# Altium PCB PCB1.PcbDoc (part 2 of 6)
Units mil, origin at the board's own origin, x right, y up, seen from the top; angles counter-clockwise.
Board outline 7480.32 x 4921.26 mil, 4 copper layers (Top Layer, GND, POWER, Bottom Layer), stack 23.756 mil thick; 513 components, 387 nets, 1792 pads, 594 vias.
Unrouted connection lines stored in the file: 21.
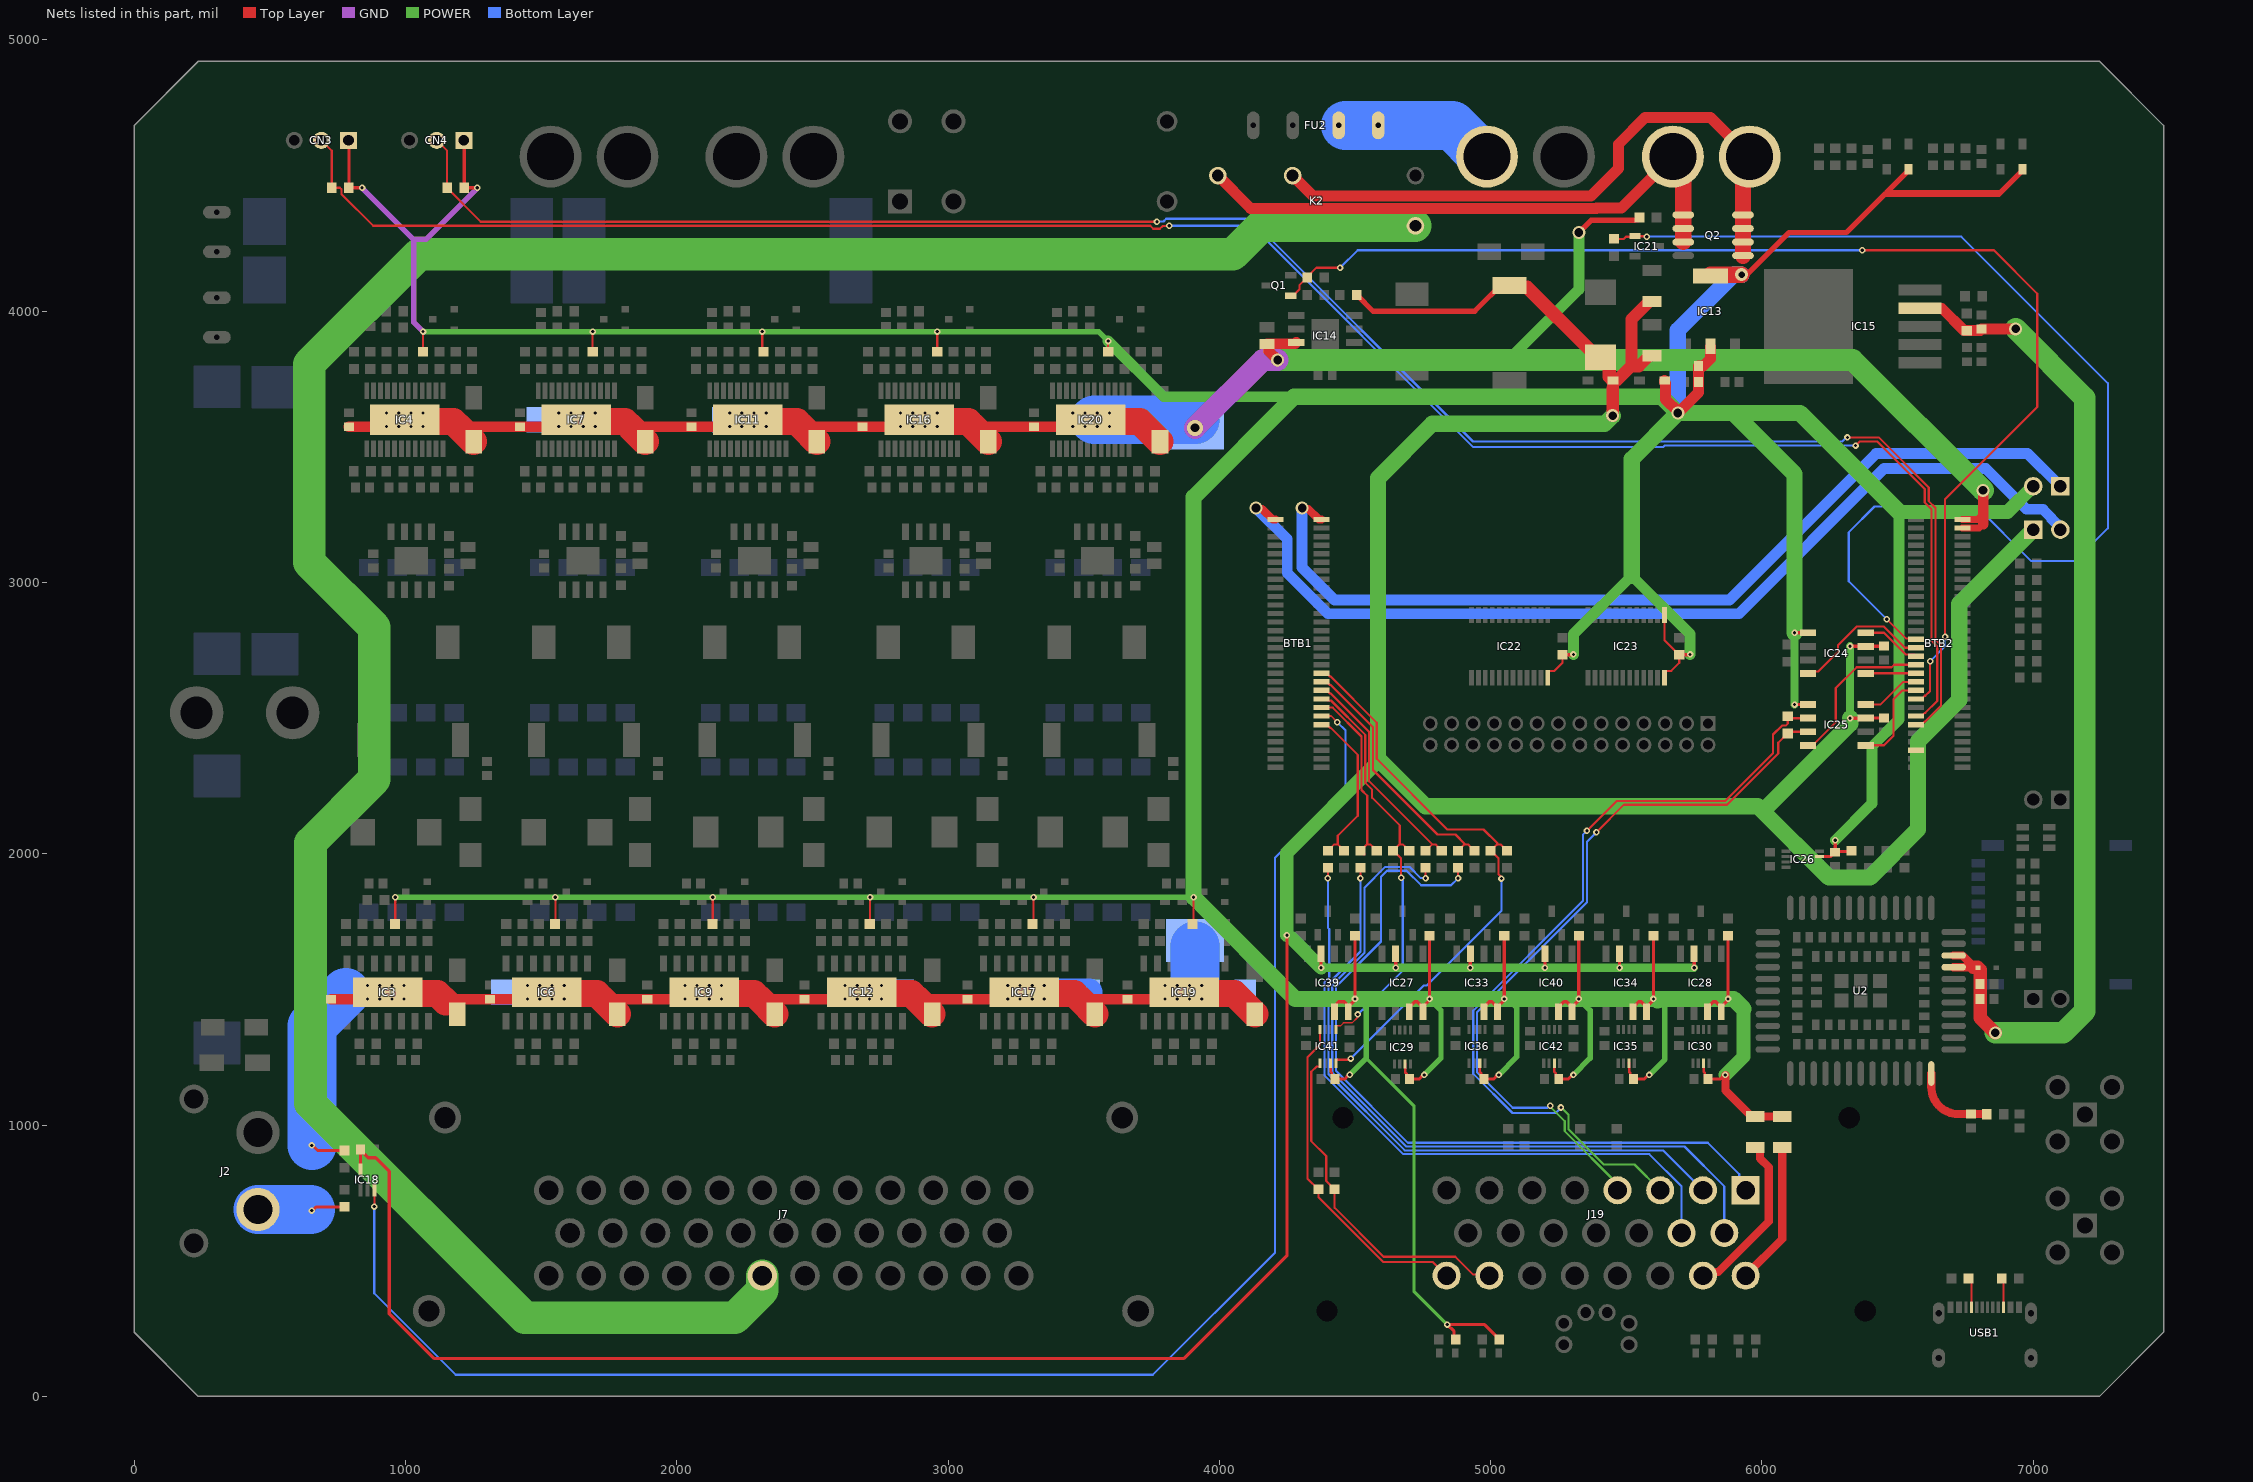
[diagram p4: the nets of this part, all layers, seen from the top]

## Footprints (in the part's own frame and the unit in brackets; to place one, negate y for a bottom-side part, rotate by r counter-clockwise, add the part's x,y. Pads: shape width x height; smd on the part's side, far side on the other; paste and mask are expansions set on the pad) (continued)
KHIPEXSMAKWE [mm]
  rect 2.25x2.25 hole 1.5: 1(0,0)
  round 2.25 hole 1.5: 2(-2.54,-2.54) 3(2.54,-2.54) 4(2.54,2.54) 5(-2.54,2.54)
  silkscreen extent -11.6,-4.2 3.2,3.2, body extent -11.6,-3.2 3.2,3.2, height 9.8
LCC-109_L17.7-W15.8-P1.10_EC800M-CN [mm]
  oval 2.3x0.6 smd: 1(-7.75,6.6) 2(-7.75,5.5) 3(-7.75,4.4) 4(-7.75,3.3) 5(-7.75,2.2) 6(-7.75,1.1) 7(-7.75,0) 8(-7.75,-1.1) 9(-7.75,-2.2) 10(-7.75,-3.3) 11(-7.75,-4.4) 12(-7.75,-5.5) 13(-7.75,-6.6) 23(7.75,-6.6) 24(7.75,-5.5) 25(7.75,-4.4) 26(7.75,-3.3) 27(7.75,-2.2) 28(7.75,-1.1) 29(7.75,0) 30(7.75,1.1) 31(7.75,2.2) 32(7.75,3.3) 33(7.75,4.4) 34(7.75,5.5) 35(7.75,6.6)
  oval 0.6x2.3 smd: 14(-4.4,-8.7) 15(-3.3,-8.7) 16(-2.2,-8.7) 17(-1.1,-8.7) 18(0,-8.7) 19(1.1,-8.7) 20(2.2,-8.7) 21(3.3,-8.7) 22(4.4,-8.7) 36(4.4,8.7) 37(3.3,8.7) 38(2.2,8.7) 39(1.1,8.7) 40(0,8.7) 41(-1.1,8.7) 42(-2.2,8.7) 43(-3.3,8.7) 44(-4.4,8.7) 95(-5.5,-8.7) 96(5.5,-8.7) 97(5.5,8.7) 98(-5.5,8.7)
  rect 1x0.7 smd: 45(-5,4.8) 46(-5,3.6) 47(-5,2.4) 48(-5,1.2) 49(-5,0) 50(-5,-1.2) 51(-5,-2.4) 52(-5,-3.6) 53(-5,-4.8) 59(5,-4.8) 60(5,-3.6) 61(5,-2.4) 62(5,-1.2) 63(5,0) 64(5,1.2) 65(5,2.4) 66(5,3.6) 67(5,4.8) 73(-3.2,4.2) 74(-3.2,3) 75(-3.2,1.8) 76(-3.2,0.6) 77(-3.2,-0.6) 78(-3.2,-1.8) 79(-3.2,-3) 80(-3.2,-4.2) 81(3.2,-4.2) 82(3.2,-3) 83(3.2,-1.8) 84(3.2,-0.6) 85(3.2,0.6) 86(3.2,1.8) 87(3.2,3) 88(3.2,4.2) 99(-5,6) 100(-5,-6) 103(5,-6) 104(5,6)
  rect 0.7x1 smd: 54(-2.4,-5.95) 55(-1.2,-5.95) 56(0,-5.95) 57(1.2,-5.95) 58(2.4,-5.95) 68(2.4,5.95) 69(1.2,5.95) 70(0,5.95) 71(-1.2,5.95) 72(-2.4,5.95) 101(-3.6,-5.95) 102(3.6,-5.95) 105(3.6,5.95) 106(-3.6,5.95) 107(-1.2,-4.15) 108(0,-4.15) 109(1.2,-4.15)
  rect 1.3x1.3 smd: 89(-0.9,1.8) 90(-0.9,0) 91(-0.9,-1.8) 92(0.9,-1.8) 93(0.9,0) 94(0.9,1.8)
  silkscreen extent -9.4,-8.9 7.9,9
LED-SMD_L1.7-W1.1-R-RD_GREEN [mm]
  rect 0.6x0.8 smd: 1(0.75,0) 2(-0.75,0)
  silkscreen extent -0.49,-0.25 0.48,0.85
MIC29302WU [mil]
  rect 40.98x159.02 smd: 1(-134.02,0) 2(-67.01,0) 3(0,0) 4(67.01,0) 5(134.02,0)
  rect 422.99x327.01 smd: 6(0,411.5)
  silkscreen extent -200,-105 200,229, body extent -210,-78 210,547, height 203
POSCAP_D12_D15_D15E_D2E_D2_D3L_D4 [mm]
  rect 2.4x2.9 smd: 1(-3.05,0) 2(3.05,0)
  silkscreen extent -4.95,-2.15 3.65,2.15, body extent -3.65,-2.15 3.65,2.15, height 1.8
QM13.2 [mm]
  rect 1.6x1.8 smd: 1(-6.8,0) 2(6.8,0)
  silkscreen extent -5.59,-0.76 5.59,0.76
RESC1608X55N [mm]
  rect 0.9x0.95 smd: 1(-0.8,0) 2(0.8,0)
  silkscreen extent 0,-0.3 0,0.3, body extent -0.8,-0.4 0.8,0.4, height 0.55
RESC3116X65N [mm]
  rect 1.05x1.75 smd: 1(-1.45,0) 2(1.45,0)
  silkscreen extent 0,-0.69 0,0.69, body extent -1.55,-0.79 1.55,0.79, height 0.65
RESC6432X06N__2512RES [mm] "Chip Resistor, 2-Leads, Body 6.35x3.20mm, IPC Medium Density"
  rect 1.15x3.4 smd: 1(-3,0) 2(3,0)
  silkscreen extent -2.05,-1.6 2.05,1.6, body extent -3.2,-1.6 3.2,1.6, height 1.1
SDRH104R3R3NT [mm]
  rect 3.2x1.6 smd: 1(0,-4.45) 2(0,4.45)
  silkscreen extent -5,-5.8 5,5.1, body extent -5,-5.1 5,5.1, height 4.2
SIM-SMD_SMN-303 [mm]
  rect 1x2.1 smd: 8(-6.5,5.328) 9(6.5,5.328) 10(6.5,-6.672) 11(-6.5,-6.672)
  rect 0.8x1.3 smd: C1(0.25,6.672) C2(-2.29,6.672) C3(-4.83,6.672) C6(-1.02,6.672) C7(-3.56,6.672)
  rect 0.65x1.3 smd: C5(1.52,6.672) CD(2.47,6.672)
  Keep-Out Layer board cut-out: 3.875,-5.422 3.875,-5.348 3.818,-5.21 3.712,-5.104 3.575,-5.047 3.425,-5.047 3.288,-5.104 3.182,-5.21 3.125,-5.348 3.125,-5.422 3.125,-5.497 3.182,-5.635 3.288,-5.74 3.425,-5.797 3.575,-5.797 3.712,-5.74 3.818,-5.635 3.875,-5.497 3.875,-5.422 3.875,-5.422
  Keep-Out Layer board cut-out: -4.625,-5.422 -4.625,-5.348 -4.682,-5.21 -4.787,-5.104 -4.925,-5.047 -5.074,-5.047 -5.212,-5.104 -5.318,-5.21 -5.375,-5.348 -5.375,-5.422 -5.375,-5.497 -5.318,-5.635 -5.212,-5.74 -5.074,-5.797 -4.925,-5.797 -4.787,-5.74 -4.682,-5.635 -4.625,-5.497 -4.625,-5.422 -4.625,-5.422
  Multi-Layer keep-out circle w0.254: c3.5,-5.422 r0.375
  Multi-Layer keep-out circle w0.254: c-5,-5.422 r0.375
  silkscreen extent -6.04,-7.49 6.04,6.16
SOD-323_L1.8-W1.3-LS2.5-RD [mm]
  rect 1x0.75 smd: 1(-1.173,0) 2(1.173,0)
  silkscreen extent -1.08,-0.8 0.9,0.8
SOIC127P600X115-15N [mm]
  rect 1.525x0.65 smd: 1(-2.712,3.81) 2(-2.712,2.54) 3(-2.712,1.27) 4(-2.712,0) 5(-2.712,-1.27) 6(-2.712,-2.54) 7(-2.712,-3.81) 8(2.712,-3.81) 9(2.712,-2.54) 10(2.712,-1.27) 11(2.712,0) 12(2.712,1.27) 13(2.712,2.54) 14(2.712,3.81)
  rect 2.75x6.5 smd: 15(0,0)
  silkscreen extent -3.47,4.48 -1.95,4.48, body extent -3,-4.33 3,4.33, height 1.15
SOIC127P600X170-9N [mm]
  rect 1.525x0.65 smd: 1(-2.712,1.905) 2(-2.712,0.635) 3(-2.712,-0.635) 4(-2.712,-1.905) 5(2.712,-1.905) 6(2.712,-0.635) 7(2.712,0.635) 8(2.712,1.905)
  rect 2.6x3.1 smd: 9(0,0)
  silkscreen extent -3.48,2.58 -1.95,2.58, body extent -3.01,-2.45 3.01,2.45, height 1.57
SOIC127P600X175-8N [mm]
  rect 1.5x0.65 smd: 1(-2.7,1.905) 2(-2.7,0.635) 3(-2.7,-0.635) 4(-2.7,-1.905) 5(2.7,-1.905) 6(2.7,-0.635) 7(2.7,0.635) 8(2.7,1.905)
  silkscreen extent -3.45,-2.45 1.6,2.58, body extent -3,-2.45 3,2.45, height 1.75
SOIC127P600X175-8N_AO4805 [mm]
  rect 1.525x0.65 smd: 1(-2.712,1.905) 2(-2.712,0.635) 3(-2.712,-0.635) 4(-2.712,-1.905) 5(2.712,-1.905) 6(2.712,-0.635) 7(2.712,0.635) 8(2.712,1.905)
  silkscreen extent -3.47,-2.45 1.6,2.58, body extent -3,-2.45 3,2.45, height 1.75
SOP50P310X90-8N [mm]
  rect 0.85x0.3 smd: 1(-1.575,0.75) 2(-1.575,0.25) 3(-1.575,-0.25) 4(-1.575,-0.75) 5(1.575,-0.75) 6(1.575,-0.25) 7(1.575,0.25) 8(1.575,0.75)
  silkscreen extent -2,-1 0.8,1.25, body extent -1.55,-1 1.55,1, height 0.77
SOP65P600X115-25N [mm]
  rect 1.525x0.45 smd: 1(-2.712,3.575) 2(-2.712,2.925) 3(-2.712,2.275) 4(-2.712,1.625) 5(-2.712,0.975) 6(-2.712,0.325) 7(-2.712,-0.325) 8(-2.712,-0.975) 9(-2.712,-1.625) 10(-2.712,-2.275) 11(-2.712,-2.925) 12(-2.712,-3.575) 13(2.712,-3.575) 14(2.712,-2.925) 15(2.712,-2.275) 16(2.712,-1.625) 17(2.712,-0.975) 18(2.712,-0.325) 19(2.712,0.325) 20(2.712,0.975) 21(2.712,1.625) 22(2.712,2.275) 23(2.712,2.925) 24(2.712,3.575)
  rect 2.87x6.5 smd: 25(0,0)
  silkscreen extent -3.47,4.15 -1.95,4.15, body extent -3,-4.33 3,4.33, height 1.15
SOP65P640X120-24N [mm]
  rect 1.475x0.45 smd: 1(-2.938,3.575) 2(-2.938,2.925) 3(-2.938,2.275) 4(-2.938,1.625) 5(-2.938,0.975) 6(-2.938,0.325) 7(-2.938,-0.325) 8(-2.938,-0.975) 9(-2.938,-1.625) 10(-2.938,-2.275) 11(-2.938,-2.925) 12(-2.938,-3.575) 13(2.938,-3.575) 14(2.938,-2.925) 15(2.938,-2.275) 16(2.938,-1.625) 17(2.938,-0.975) 18(2.938,-0.325) 19(2.938,0.325) 20(2.938,0.975) 21(2.938,1.625) 22(2.938,2.275) 23(2.938,2.925) 24(2.938,3.575)
  silkscreen extent -3.68,-3.9 1.85,4.15, body extent -3.2,-3.9 3.2,3.9, height 1.13
SOP-8_L4.9-W3.8-P1.27-LS6.0-BL [mil]
  oval 25.59x80 smd: 1(-75,-110.08) 2(-25,-110.08) 3(25,-110.08) 4(75,-110.08) 5(75,110.08) 6(25,110.08) 7(-25,110.08) 8(-75,110.08)
  silkscreen extent -108,-85 101,57
SOT65P210X110-6N [mm]
  rect 1.2x0.4 smd: 1(-0.95,0.65) 2(-0.95,0) 3(-0.95,-0.65) 4(0.95,-0.65) 5(0.95,0) 6(0.95,0.65)
  silkscreen extent -1.55,1.2 -0.35,1.2, body extent -1.05,-0.99 1.05,1.01, height 1
SOT95P230X110-3N [mm]
  rect 1.05x0.6 smd: 1(-1.1,0.95) 2(-1.1,-0.95) 3(1.1,0)
  silkscreen extent -1.63,-1.45 0.23,1.5, body extent -1.15,-1.45 1.15,1.45, height 1.1
SOT95P280X145-6N [mm]
  rect 1.15x0.6 smd: 1(-1.25,0.95) 2(-1.25,0) 3(-1.25,-0.95) 4(1.25,-0.95) 5(1.25,0) 6(1.25,0.95)
  silkscreen extent -1.83,-1.48 0.33,1.6, body extent -1.4,-1.48 1.4,1.48, height 1.45
SOT229P700X180-4N [mm]
  rect 1.45x0.95 smd: 1(-3.3,2.29) 2(-3.3,0) 3(-3.3,-2.29)
  rect 1.45x3.25 smd: 4(3.3,0)
  silkscreen extent -4.03,-3.25 1.75,3.25, body extent -3.35,-3.15 3.36,3.15, height 1.8
SW-TH_XKB5858-Z-E [mm]
  round 1.6 hole 1: 1(-3.05,1.5) 2(-3.05,-0.5) 3(3.05,1.5) 4(3.05,-0.5) 5(-1,-1.5) 6(1,-1.5)
  silkscreen extent -2.9,-1.52 2.92,8.8
USB-C-SMD_TYPE-C-6PIN-2MD-073 [mm]
  rect 0.55x1.1 smd: 1(-3.2,2.375) 2(-2.4,2.375) 11(2.4,2.375) 12(3.2,2.375)
  rect 0.3x1.1 smd: 3(-1.75,2.375) 4(-1.25,2.375) 5(-0.75,2.375) 6(-0.25,2.375) 7(0.25,2.375) 8(0.75,2.375) 9(1.25,2.375) 10(1.75,2.375)
  oval 1.1x2 hole 0.6 slot 1.5 at 90 deg: 13(-4.325,1.825) 14(4.325,1.825)
  oval 1.2x1.8 hole 0.6 slot 1.2 at 90 deg: 13(-4.325,-2.375) 14(4.325,-2.375)
  Keep-Out Layer board cut-out: -2.54,1.305 -2.541,1.374 -2.595,1.5 -2.694,1.597 -2.821,1.649 -2.959,1.649 -3.086,1.597 -3.184,1.5 -3.239,1.374 -3.24,1.305 -3.239,1.236 -3.184,1.11 -3.086,1.013 -2.959,0.961 -2.821,0.961 -2.694,1.013 -2.595,1.11 -2.541,1.236 -2.54,1.305 -2.54,1.305
  Keep-Out Layer board cut-out: 3.24,1.305 3.239,1.374 3.185,1.5 3.086,1.597 2.959,1.649 2.821,1.649 2.694,1.597 2.596,1.5 2.541,1.374 2.54,1.305 2.541,1.236 2.596,1.11 2.694,1.013 2.821,0.961 2.959,0.961 3.086,1.013 3.185,1.11 3.239,1.236 3.24,1.305 3.24,1.305
  Multi-Layer keep-out circle w0.254: c-2.89,1.305 r0.35
  Multi-Layer keep-out circle w0.254: c2.89,1.305 r0.35
  silkscreen extent -4.5,-4.97 4.57,0.6
WS45D3HV [mm]
  rect 0.5x0.4 smd: 1(-0.85,0) 2(0.85,0)
  silkscreen extent -1.65,-0.63 0.85,0.63, body extent -1.06,-0.63 1.06,0.63, height 0.8
XF-506P [mm] "for-automotivefuse-mini"
  oval 1.2x2.6 hole 0.5 slot 1.9 at 90 deg: 1(0,0) 1(3.7,0) 2(8,0) 2(11.7,0)
  silkscreen extent -1.55,-2.75 13.25,2.05
磁环电感_卧式 [mm]
  round 5 hole 3: 1(0,-15) 2(0,-6)
  silkscreen extent -14.1,-14.67 14.1,-5.13

## Part data
C1 C2 C4 C7 C8 C9 C10 C11 C12 C13 C14 C16 C19 C20 C21 C22 C23 C27 C28 C29 C30 C31 C32 C33 C34 C38 C39 C40 C41 C42 C43 C45 C48 C49 C50 C51 C52 C53 C54 C55 C56 C57 C58 C61 C62 C63 C64 C72 C73 C74 C75 C76 C78 C79 C80 C81 C82 C83 C84 C85 C86 C87 C88 C89 C94 C95 C100 C101 C102 C103 C104 C105 C106 C107 C108 C109 C110 C111: library part C0603, "Capacitor CC0603KRX7R9BB104", Arrow Part Number=CC0603KRX7R9BB104, Manufacturer_Name=YAGEO, Mouser Part Number=603-CC603KRX7R9BB104, Arrow Price/Stock=https://www.arrow.com/en/products/cc0603krx7r9bb104/yageo?region=europe, Datasheet Link=https://componentsearchengine.com/Datasheets/2/CC0603KRX7R9BB104.pdf, Height=0.9mm, Manufacturer_Part_Number=CC0603KRX7R9BB104, Mouser Price/Stock=https://www.mouser.co.uk/ProductDetail/YAGEO/CC0603KRX7R9BB104?qs=vTakOoo5QyLvVCYM2ge8LQ%3D%3D
C3 C15: "Capacitor Polarised", Manufacturer_Name="Kyocera AVX", Mouser Part Number=581-TAJE337M016RNJ, Arrow Part Number=TAJE337M016RNJ, Arrow Price/Stock=null?region=asia, Datasheet Link=http://datasheets.avx.com/TAJ.pdf, Height=4.3mm, Manufacturer_Part_Number=TAJE337M016RNJ, Mouser Price/Stock=https://www.mouser.co.uk/ProductDetail/AVX/TAJE337M016RNJ?qs=y3iDra2JAa8YWVPUw61OpA%3D%3D
C5 C17 C25 C36 C46 C60: library part C0805, "Capacitor", Arrow Part Number=CC0805KRX7R9BB104, Manufacturer_Name=YAGEO, Mouser Part Number=603-CC805KRX7R9BB104, Arrow Price/Stock=https://www.arrow.com/en/products/cc0805krx7r9bb104/yageo?region=nac, Datasheet Link=https://www.yageo.com/upload/media/product/productsearch/datasheet/mlcc/UPY-GPHC_X7R_6.3V-to-50V_20.pdf, Height=0.95mm, Manufacturer_Part_Number=CC0805KRX7R9BB104, Mouser Price/Stock=https://www.mouser.co.uk/ProductDetail/YAGEO/CC0805KRX7R9BB104?qs=vTakOoo5QyLx0lXWgVtRhQ%3D%3D
C6 C18 C26 C37 C47 C65 C66 C67 C68 C69 C70 C71 C90 C91 C92 C93 C96 C97 C98 C99: library part C0603, "Capacitor", Arrow Part Number=CC0603KRX7R9BB104, Manufacturer_Name=YAGEO, Mouser Part Number=603-CC603KRX7R9BB104, Arrow Price/Stock=https://www.arrow.com/en/products/cc0603krx7r9bb104/yageo?region=europe, Datasheet Link=https://componentsearchengine.com/Datasheets/2/CC0603KRX7R9BB104.pdf, Height=0.9mm, Manufacturer_Part_Number=CC0603KRX7R9BB104, Mouser Price/Stock=https://www.mouser.co.uk/ProductDetail/YAGEO/CC0603KRX7R9BB104?qs=vTakOoo5QyLvVCYM2ge8LQ%3D%3D
C24 C35 C44 C59: "Capacitor Polarised", Manufacturer_Name=Panasonic, Mouser Part Number=667-10TPB330M, Arrow Part Number=10TPB330M, Arrow Price/Stock=https://www.arrow.com/en/products/10tpb330m/panasonic?region=nac, Datasheet Link=http://industrial.panasonic.com/cdbs/www-data/pdf/AAA8000/AAA8000C65.pdf, Manufacturer_Part_Number=10TPB330M, Mouser Price/Stock=https://www.mouser.co.uk/ProductDetail/Panasonic/10TPB330M?qs=OE1iw1LrrPGJ%2FhG9UwG4gg%3D%3D
C77: "Capacitor", Arrow Part Number=CC0603KRX7R9BB104, Manufacturer_Name=YAGEO, Mouser Part Number=603-CC603KRX7R9BB104, Arrow Price/Stock=https://www.arrow.com/en/products/cc0603krx7r9bb104/yageo?region=europe, Datasheet Link=https://componentsearchengine.com/Datasheets/2/CC0603KRX7R9BB104.pdf, Height=0.9mm, Manufacturer_Part_Number=CC0603KRX7R9BB104, Mouser Price/Stock=https://www.mouser.co.uk/ProductDetail/YAGEO/CC0603KRX7R9BB104?qs=vTakOoo5QyLvVCYM2ge8LQ%3D%3D
CARD1: JLCPCB Part Class="Extended Part", LCSC Part Name="自弹式 NanoSIM卡 卡座", Manufacturer=XUNPU(讯普), Operating Temperature Range=-40℃~+85℃, Add into BOM=yes, Body Height (Max)=1.37mm, Card Connection Mode=自弹式, Card Detection=有插卡检测, Card Type=NanoSIM卡, Connector Type=卡座, Convert to PCB=yes, Datasheet=https://atta.szlcsc.com/upload/public/pdf/source/20230608/69FA23A73293DEADC31E393DD83871F4.pdf, Device=SMN-303, Manufacturer Part=SMN-303, Supplementary Features=-, Supplier=LCSC, Supplier Footprint=SMD, Supplier Part=C266888, Symbol=SMN-303
CN3 CN4: Current Rating (Max)=3A, JLCPCB Part Class="Extended Part", Manufacturer=Megastar(兆星), Operating Temperature Range=-25℃~+85℃, Add into BOM=yes, Contact Material=黄铜, Contact Plating=锡, Convert to PCB=yes, Datasheet=https://atta.szlcsc.com/upload/public/pdf/source/20230619/AE17037A2CFDBE8D9CBA775D61AD0A84.pdf, Device=ZX-XH2.54-3PZZ, LCSC Part Name=ZX-XH2.54-3PZZ, Manufacturer Part=ZX-XH2.54-3PZZ, Mounting Style=直插, Number of Pins=3P, Number of PINs Per Row=3, Number of Rows=1, Pins Structure=1x3P, Pitch=2.54mm, Reference Series=XH, Row Spacing=-, Supplier=LCSC, Supplier Footprint=插件,P=2.54mm, Supplier Part=C7429633, Symbol=ZX-XH2.54-3PZZ
D1 D4 D12 D13 D18 D22 D26 D28 D30 D33 D34: "TVS Diode (Bi-directional)", Manufacturer_Name=LITTELFUSE, Mouser Part Number=576-SMAJ58CA, Arrow Part Number=SMAJ58CA, Arrow Price/Stock=https://www.arrow.com/en/products/smaj58ca/littelfuse?region=nac, Datasheet Link=http://www.littelfuse.com/~/media/electronics/datasheets/tvs_diodes/littelfuse_tvs_diode_smaj_datasheet.pdf.pdf, Height=2.29mm, Manufacturer_Part_Number=SMAJ58CA, Mouser Price/Stock=https://www.mouser.co.uk/ProductDetail/Littelfuse/SMAJ58CA?qs=zHiv0nsVGmqWEBj8DDvFYg%3D%3D
D2 D9 D11 D15 D19 D24: "Diode", Manufacturer_Name="HY Electronic"
  D2 D9 D15 D19 D24: Datasheet Link=https://datasheet.datasheetarchive.com/originals/distributors/Datasheets-3/DSA-43270.pdf, Height=2.44mm, Manufacturer_Part_Number=SS54B
  D11: Datasheet Link=https://datasheet.datasheetarchive.com/originals/distributors/Datasheets-3/DSA-43252.pdf, Height=2.62mm, Manufacturer_Part_Number=SS34A
D3 D10 D16 D20 D25 D31: "Diode", Manufacturer_Name="Diodes Incorporated", Mouser Part Number=621-B540C-F, Arrow Part Number=B540C-13-F, Arrow Price/Stock=https://www.arrow.com/en/products/b540c-13-f/diodes-incorporated?region=nac, Datasheet Link=https://componentsearchengine.com/Datasheets/2/B540C-13-F.pdf, Height=2.5mm, Manufacturer_Part_Number=B540C-13-F, Mouser Price/Stock=https://www.mouser.co.uk/ProductDetail/Diodes-Incorporated/B540C-13-F?qs=v2dnQLbuoRZXHN%2FK4ft5%252Bg%3D%3D
D5 D6 D14 D17 D21 D23 D27 D29 D32 D35 D36: "Diode", Manufacturer_Name=Nexperia, Mouser Part Number=771-BAS21-T/R, Arrow Part Number=BAS21,215, Arrow Price/Stock=https://www.arrow.com/en/products/bas21215/nexperia, Datasheet Link=https://assets.nexperia.com/documents/data-sheet/BAS21.pdf, Height=1.1mm, Manufacturer_Part_Number=BAS21,215, Mouser Price/Stock=https://www.mouser.co.uk/ProductDetail/Nexperia/BAS21215?qs=me8TqzrmIYVAUvbefFMRnQ%3D%3D
D7: "Diode C2902910", Manufacturer_Name="Wurth Elektronik", Manufacturer_Part_Number=824500850, Mouser Part Number=710-824500850, Datasheet Link=https://datasheet.datasheetarchive.com/originals/distributors/DKDS-9/170649.pdf, Height=2.5mm, Mouser Price/Stock=http://www.mouser.com/Search/ProductDetail.aspx?qs=16w8nSHsg3sA6biQsu7wzg%3d%3d
D8: "TVS Diode (Bi-directional)", Manufacturer_Name=Bourns, Mouser Part Number=652-SMAJ28CA, Arrow Part Number=SMAJ28CA, Arrow Price/Stock=https://www.arrow.com/en/products/smaj28ca/bourns?utm_currency=USD&region=nac, Datasheet Link=https://www.bourns.com/data/global/pdfs/SMAJ.pdf, Height=2.62mm, Manufacturer_Part_Number=SMAJ28CA, Mouser Price/Stock=https://www.mouser.co.uk/ProductDetail/Bourns/SMAJ28CA?qs=A3H9pljuJ8Rc2FOBsYvsOw%3D%3D
D37: "TVS Diode (Uni-directional)", Manufacturer_Name=Way-On, Datasheet Link=https://www.way-on.com/upload/201807/31/201807311326214442.pdf, Height=0.7mm, Manufacturer_Part_Number=WS4.5D3HV
D38: "TVS Diode (Uni-directional)", Manufacturer_Name=SEMTECH, Mouser Part Number=947-SRV05-4.TCT, Arrow Part Number=SRV05-4.TCT, Arrow Price/Stock=https://www.arrow.com/en/products/srv05-4.tct/semtech?utm_currency=USD&region=nac, Datasheet Link=https://datasheet.datasheetarchive.com/originals/distributors/Datasheets-DGA26/1842016.pdf, Height=1.45mm, Manufacturer_Part_Number=SRV05-4.TCT, Mouser Price/Stock=https://www.mouser.co.uk/ProductDetail/Semtech/SRV05-4.TCT?qs=rBWM4%252BvDhIe0tfPjqKjR5Q%3D%3D
E1: Breakdown Voltage (VBR)=6.2V, Clamping Voltage@Ipp=15.5V, JLCPCB Part Class="Extended Part", LCSC Part Name=单向ESD, Manufacturer=CJ(江苏长电/长晶), Peak Pulse Current(Ipp)@8/20us=15A, Reverse Stand-Off Voltage (Vrwm)=5V, Add into BOM=yes, Convert to PCB=yes, Datasheet=https://atta.szlcsc.com/upload/public/pdf/source/20140301/1457707004115.pdf, Device="CESD5V0D3 ZA", Manufacturer Part="CESD5V0D3 ZA", Name="CESD5V0D3 ZA", Polarity=单向, Supplier=LCSC, Supplier Footprint=SOD-323, Supplier Part=C22643, Symbol="CESD5V0D3 ZA"
E2 E3 E4 E5 E6: "极性:单向;反向截止电压(Vrwm):3.3V;击穿电压(VBR):5V;钳位电压(Vc)@Ipp:13V;", Breakdown Voltage (VBR)=5V, Clamping Voltage@Ipp=13V, LCSC Part Name=单向ESD, Manufacturer=CJ(江苏长电/长晶), Peak Pulse Current(Ipp)@8/20us=16A, Reverse Stand-Off Voltage (Vrwm)=3.3V, Add into BOM=yes, Convert to PCB=yes, Datasheet=https://atta.szlcsc.com/upload/public/pdf/source/20150915/1457707371129.pdf, Device="CESD3V3D3 YU", Manufacturer Part="CESD3V3D3 YU", Name="CESD3V3D3 YU", Polarity=单向, Supplier=LCSC, Supplier Footprint=SOD-323, Supplier Part=C38388, Symbol=CESD3V3D3
F1 F2 F3 F4: library part R1206, Manufacturer_Name="UNI-ROYAL(Uniroyal Elec)", Manufacturer_Part_Number=1206W4F1002T5E, Datasheet Link=https://datasheet.lcsc.com/szlcsc/Uniroyal-Elec-1206W4F1002T5E_C17902.pdf, Height=0.65mm
FU1 FU2: "小型汽车插片保险丝座"
IC1 IC2 IC5 IC8 IC10 IC14: "Integrated Circuit", Manufacturer_Name="Texas Instruments", Mouser Part Number=595-TPS5450DDAR, Arrow Part Number=TPS5450DDAR, Arrow Price/Stock=https://www.arrow.com/en/products/tps5450ddar/texas-instruments?region=nac, Datasheet Link=http://www.ti.com/general/docs/suppproductinfo.tsp?distId=10&gotoUrl=http%3A%2F%2Fwww.ti.com%2Flit%2Fgpn%2Ftps5450, Height=1.7mm, Manufacturer_Part_Number=TPS5450DDAR, Mouser Price/Stock=https://www.mouser.co.uk/ProductDetail/Texas-Instruments/TPS5450DDAR?qs=h%2FYsCRHtaqPaz8oWBdcCug%3D%3D
IC3 IC6 IC9 IC12 IC17 IC19: "Integrated Circuit", Manufacturer_Name=Infineon, Mouser Part Number=726-BTT60502ERAXUMA1, Arrow Part Number=BTT60502ERAXUMA1, Arrow Price/Stock=https://www.arrow.com/en/products/btt60502eraxuma1/infineon-technologies-ag?region=nac, Datasheet Link=https://www.infineon.com/dgdl/Infineon-BTT6050-2ERA-DS-v01_00-EN.pdf?fileId=5546d46269e1c019016a21d599df0d6a, Height=1.15mm, Manufacturer_Part_Number=BTT60502ERAXUMA1, Mouser Price/Stock=https://www.mouser.co.uk/ProductDetail/Infineon-Technologies/BTT60502ERAXUMA1?qs=mAH9sUMRCtsi1%2FDCmYjCiw%3D%3D
IC4 IC7 IC11 IC16 IC20: "Integrated Circuit", Manufacturer_Name=Infineon, Mouser Part Number=726-BTT62004ESAXUMA1, Arrow Part Number=BTT62004ESAXUMA1, Arrow Price/Stock=https://www.arrow.com/en/products/btt62004esaxuma1/infineon-technologies-ag, Datasheet Link=https://componentsearchengine.com/Datasheets/2/BTT62004ESAXUMA1.pdf, Height=1.15mm, Manufacturer_Part_Number=BTT62004ESAXUMA1, Mouser Price/Stock=https://www.mouser.co.uk/ProductDetail/Infineon-Technologies/BTT62004ESAXUMA1?qs=unwgFEO1A6tpV1sLwJtTRA%3D%3D
IC13: "Integrated Circuit", Manufacturer_Name=Advanced, Datasheet Link=https://datasheet.datasheetarchive.com/originals/distributors/Datasheets-28/DSA-550594.pdf, Height=1.8mm, Manufacturer_Part_Number=AMS1117-3.3
IC15: "Integrated Circuit", Manufacturer_Name=Microchip, Mouser Part Number=998-MIC29302WU, Arrow Part Number=MIC29302WU, Arrow Price/Stock=https://www.arrow.com/en/products/mic29302wu/microchip-technology?region=nac, Datasheet Link=https://www.mouser.in/datasheet/2/268/MIC2915x_30x_50x_75x_High_Current_Low_Dropout_Regu-1889172.pdf, Height=5.08mm, Manufacturer_Part_Number=MIC29302WU, Mouser Price/Stock=https://www.mouser.co.uk/ProductDetail/Microchip-Technology/MIC29302WU?qs=kh6iOki%2FeLGH5fS1ZBQ3pA%3D%3D
IC18: "Integrated Circuit", Manufacturer_Name="Texas Instruments", Mouser Part Number=595-INA199A1DCKR, Arrow Part Number=INA199A1DCKR, Arrow Price/Stock=https://www.arrow.com/en/products/ina199a1dckr/texas-instruments?region=nac, Datasheet Link=http://www.ti.com/lit/ds/symlink/ina199.pdf, Height=1.1mm, Manufacturer_Part_Number=INA199A1DCKR, Mouser Price/Stock=https://www.mouser.co.uk/ProductDetail/Texas-Instruments/INA199A1DCKR?qs=v3hU%2FV0XOahkyIKIBScY5Q%3D%3D
IC21 IC31 IC32 IC37 IC38 IC43 IC44: "Integrated Circuit", Manufacturer_Name=Nylofix, Manufacturer_Part_Number=2N7002P,235, Datasheet Link=https://4donline.ihs.com/images/VipMasterIC/IC/PHGL/PHGLS21946/PHGLS21946-1.pdf?hkey=EF798316E3902B6ED9A73243A3159BB0, Height=1.1mm
IC22 IC23: "Integrated Circuit", Manufacturer_Name="Texas Instruments", Mouser Part Number=595-TCA9548APWR, Arrow Part Number=TCA9548APWR, Arrow Price/Stock=https://www.arrow.com/en/products/tca9548apwr/texas-instruments?region=nac, Datasheet Link=http://www.ti.com/lit/ds/symlink/tca9548a.pdf, Height=1.2mm, Manufacturer_Part_Number=TCA9548APWR, Mouser Price/Stock=https://www.mouser.co.uk/ProductDetail/Texas-Instruments/TCA9548APWR?qs=iFaFN7AS2WF%252BqSiJMbdYwQ%3D%3D
IC24 IC25: "Integrated Circuit", Arrow Part Number=TJA1042T/3/1J, Manufacturer_Name=NXP, Mouser Part Number=771-TJA1042T/3/1J, Arrow Price/Stock=https://www.arrow.com/en/products/tja1042t31j/nxp-semiconductors?utm_currency=USD&region=nac, Datasheet Link=http://www.nxp.com/docs/en/data-sheet/TJA1042.pdf, Height=1.75mm, Manufacturer_Part_Number=TJA1042T/3/1J, Mouser Price/Stock=https://www.mouser.co.uk/ProductDetail/NXP-Semiconductors/TJA1042T-3-1J?qs=gNSudQoqUYC0yGbZKhqwlQ%3D%3D
IC26 IC29 IC30 IC35 IC36 IC41 IC42: "Integrated Circuit", Manufacturer_Name="Texas Instruments", Mouser Part Number=595-TXS0102DCUR, Arrow Part Number=TXS0102DCUR, Arrow Price/Stock=https://www.arrow.com/en/products/txs0102dcur/texas-instruments?utm_currency=USD&region=nac, Datasheet Link=https://datasheet.datasheetarchive.com/originals/distributors/SFDatasheet-7/sf-000145437.pdf, Height=0.9mm, Manufacturer_Part_Number=TXS0102DCUR, Mouser Price/Stock=https://www.mouser.co.uk/ProductDetail/Texas-Instruments/TXS0102DCUR?qs=dB0LedT%252BmmBcQ3I%2Fs9XEDA%3D%3D
IC27 IC28 IC33 IC34 IC39 IC40: "Integrated Circuit", Manufacturer_Name="Alpha & Omega Semiconductors", Arrow Part Number=AO4805, Arrow Price/Stock=https://www.arrow.com/en/products/ao4805/alpha-and-omega-semiconductor?utm_currency=USD&region=nac, Datasheet Link=http://www.aosmd.com/res/data_sheets/AO4805.pdf, Height=1.75mm, Manufacturer_Part_Number=AO4805
J2: "Connector", Manufacturer_Name="Changzou Amass Elec", Datasheet Link=https://www.tme.eu/Document/9b8d0c5eb7094295f3d3112c214d3ade/XT60PW%20SPEC.pdf, Height=8.4mm, Manufacturer_Part_Number=XT60PW-M
J5 J11 J24 J30 J38: library part QM13.2
J7: "Connector", Manufacturer_Name="TE Connectivity", Mouser Part Number=571-776231-1, Arrow Part Number=776231-1, Arrow Price/Stock=https://www.arrow.com/en/products/776231-1/te-connectivity?region=nac, Datasheet Link=https://www.te.com/commerce/DocumentDelivery/DDEController?Action=srchrtrv&DocNm=1-1773979-2&DocType=Data%20Sheet&DocLang=English&PartCntxt=776231-1&DocFormat=pdf, Height=34.25mm, Manufacturer_Part_Number=776231-1, Mouser Price/Stock=https://www.mouser.co.uk/ProductDetail/TE-Connectivity/776231-1?qs=YqNA2qefETAQAJm2ankyIA%3D%3D
J19: "Connector", Manufacturer_Name="TE Connectivity", Mouser Part Number=571-776228-1, Arrow Part Number=776228-1, Arrow Price/Stock=https://www.arrow.com/en/products/776228-1/te-connectivity?region=europe, Datasheet Link=https://www.te.com/commerce/DocumentDelivery/DDEController?Action=srchrtrv&DocNm=1-1773979-2&DocType=Data%20Sheet&DocLang=English&PartCntxt=776228-1&DocFormat=pdf, Height=34.25mm, Manufacturer_Part_Number=776228-1, Mouser Price/Stock=https://www.mouser.co.uk/ProductDetail/TE-Connectivity/776228-1?qs=YqNA2qefETD31MBKizKIJw%3D%3D
J33 J34 J64 J66: "Connector", Manufacturer_Name="Ckmtw(Shenzhen Cankemeng)", Manufacturer_Part_Number=B-2100S02P-A110, Datasheet Link=https://datasheet.lcsc.com/lcsc/2210192330_Ckmtw-Shenzhen-Cankemeng-B-2100S02P-A110_C124375.pdf, Height=8.8mm
J63 J65: "Connector", Manufacturer_Name="Shenzhen Kinghelm Elec", Datasheet Link=https://amel.ru/upload/iblock/99e/SMA-KWHD.pdf, Height=9.7mm, Manufacturer_Part_Number=KH-IPEX-SMAKWE
K1: "Relay or Contactor", Manufacturer_Name=Hongfa, Datasheet Link=https://docs.rs-online.com/d608/0900766b81663c99.pdf, Height=26.5mm, Manufacturer_Part_Number=HF14FW/024-HSTF
K2: "Relay or Contactor", Manufacturer_Name=Hongfa, Manufacturer_Part_Number=HF46F/024-HS1T, Datasheet Link=https://www.tme.com/Document/c87786c546bba5bb9984c9460ff2ec46/HF46F_en.pdf, Height=15.6mm
L1 L3 L4 L5 L6 L7: "Inductor", Manufacturer_Name=TSA, Manufacturer_Part_Number=SDRH104R-3R3NT, Datasheet Link=http://www.tsasun.com/uploadfile/SDRH%20Series.pdf, Height=4.1mm
L2: library part 磁环电感
LED1 LED2 LED3 LED4: Color Temperature=-, Emitted Color=翠绿色, Forward Current=25mA, JLCPCB Part Class="Extended Part", Lens Color=无色透明透镜, Manufacturer=XINGLIGHT(成兴光), Operating Temperature=-30℃~+85℃, Power Dissipation=80mW, Add into BOM=yes, Convert to PCB=yes, Datasheet=https://atta.szlcsc.com/upload/public/pdf/source/20221102/94FA3AB05D9E652787BBD0AFAAE97065.pdf, Device=XL-1606UGC, Dominant Wavelength=520nm~530nm, LCSC Part Name=XL-1606UGC, Manufacturer Part=XL-1606UGC, Mounting Sytle=侧贴, Peak Wavelength=535nm, Supplier=LCSC, Supplier Footprint=SMD,1.1x1.7mm, Supplier Part=C965863, Symbol=XL-1606UGC, Viewing Angle=120°
Q1: "MOSFET (N-Channel)", Manufacturer_Name=Nexperia, Mouser Part Number=771-BSS138P215, Arrow Part Number=BSS138P,215, Arrow Price/Stock=https://www.arrow.com/en/products/bss138p215/nexperia?utm_currency=USD&region=europe, Datasheet Link=https://assets.nexperia.com/documents/data-sheet/BSS138P.pdf, Height=1.1mm, Manufacturer_Part_Number=BSS138P,215, Mouser Price/Stock=https://www.mouser.co.uk/ProductDetail/Nexperia/BSS138P215?qs=A1cBxND5mHJyVAOcRahidg%3D%3D
Q2: library part 4409_C2922759, Continuous Drain Current (Id)=15A, Drain Source On Resistance (RDS(on)@Vgs,Id)=12mΩ@10V, Drain Source Voltage (Vdss)=30V, Gate Threshold Voltage (Vgs(th)@Id)=1V@250uA, Input Capacitance (Ciss@Vds)=2.9nF, JLCPCB Part Class="Extended Part", LCSC Part Name=P沟道增强型功率MOSFET,电流:-15A,耐压:-30V, Manufacturer=KUU, Operating Temperature=-55℃~+150℃, Power Dissipation (Pd)=3.1W, Reverse Transfer Capacitance (Crss@Vds)=280pF, Add into BOM=yes, Convert to PCB=yes, Datasheet=https://atta.szlcsc.com/upload/public/pdf/source/20211122/144BE14CBC32E189D90AEB5AEC599EE3.pdf, Device=4409_C2922759, Manufacturer Part=4409, Supplier=LCSC, Supplier Footprint=SOP-8, Supplier Part=C2922759, Symbol=4409.0, Total Gate Charge (Qg@Vgs)=48nC@10V, Type=1个P沟道
R1 R2 R3 R4 R5 R6 R7 R8 R9 R10 R11 R12 R13 R14 R15 R16 R17 R18 R19 R20 R21 R22 R23 R24 R25 R26 R27 R29 R30 R31 R32 R33 R34 R35 R36 R37 R38 R39 R40 R41 R42 R43 R44 R45 R46 R47 R48 R49 R50 R51 R52 R53 R54 R55 R56 R57 R58 R59 R60 R61 R62 R63 R64 R65 R66 R67 R68 R69 R70 R71 R72 R73 R74 R75 R76 R77 R78 R79 R80 R81 R82 R83 R84 R85 R86 R87 R88 R89 R90 R91 R92 R93 R94 R95 R96 R97 R98 R99 R100 R101 R102 R103 R104 R105 R106 R107 R109 R110 R111 R112 R113 R115 R116 R121 R123 R124 R125 R126 R127 R128 R129 R130 R131 R132 R133 R134 R135 R138 R139 R140 R141 R142 R143 R144 R145 R149 R150 R151 R152 R153 R156 R157 R161 R162 R163 R164 R165 R166 R169 R177 R178 R181 R182 R187 R189 R205 R206: library part R0603, "Resistor 0603WAF1002T5E", Manufacturer_Name="UNI-ROYAL(Uniroyal Elec)", Manufacturer_Part_Number=0603WAF1002T5E, Datasheet Link=https://datasheet.lcsc.com/szlcsc/Uniroyal-Elec-0603WAF1002T5E_C25804.pdf, Height=0.55mm
R28 R108 R114 R117 R118 R119 R122 R158 R167 R168 R170 R171 R172 R173 R174 R175 R176 R179 R180 R183 R184 R185 R186 R188 R190 R191 R192 R193 R194 R195 R196 R197 R198 R199 R200 R201 R202 R203 R204 R207 R208 R209 R210 R211 R212 R213 R214: library part R0603, "Resistor", Manufacturer_Name="UNI-ROYAL(Uniroyal Elec)", Manufacturer_Part_Number=0603WAF1002T5E, Datasheet Link=https://datasheet.lcsc.com/szlcsc/Uniroyal-Elec-0603WAF1002T5E_C25804.pdf, Height=0.55mm
R120: library part R2512, "C5375459 HoYLR2512-3W-3mR-1%"
R136 R137 R146 R147 R148 R154 R155 R159 R160: "Resistor", Manufacturer_Name="UNI-ROYAL(Uniroyal Elec)", Manufacturer_Part_Number=0603WAF1002T5E, Datasheet Link=https://datasheet.lcsc.com/szlcsc/Uniroyal-Elec-0603WAF1002T5E_C25804.pdf, Height=0.55mm
SW1: Actuator/Cap Color=白色, Contact Current=100mA, Insulation Resistance=100MΩ, JLCPCB Part Class="Extended Part", Manufacturer="XKB Connection(中国星坤)", Operating Force=2.5N, Operating Temperature=-15℃~+55℃, Voltage Rating (AC)=250V, Voltage Rating (DC)=30V, Actuator Style=方形按钮, Add into BOM=yes, Convert to PCB=yes, Datasheet=https://atta.szlcsc.com/upload/public/pdf/source/20211011/56D3FA9FC185EAC41365C3B37B684CC1.pdf, Device=XKB5858-Z-E, LCSC Part Name=XKB5858-Z-E, Manufacturer Part=XKB5858-Z-E, Mechanical Life=10万次, Mounting Style=卧插, Pin Style=PC引脚, Self Lock / No Lock=自锁, Supplier=LCSC, Supplier Footprint=插件, Supplier Part=C780038, Symbol=XKB5858-Z-E, With Lamp=不带
U1: Current Rating (Max)=3A, JLCPCB Part Class="Extended Part", Manufacturer=XUNPU(讯普), Operating Temperature Range=-25℃~+85℃, Add into BOM=yes, Convert to PCB=yes, Datasheet=https://atta.szlcsc.com/upload/public/pdf/source/20231025/E6D319634D2FEC92D75A874DF46F6A7E.pdf, Device=PHB2.0-02-28PZZ, LCSC Part Name=PHB2.0-02-28PZZ, Manufacturer Part=PHB2.0-02-28PZZ, Mounting Style=直插, Number of Pins=28P, Number of PINs Per Row=14, Number of Rows=2, Pins Structure=2x14P, Pitch=2mm, Row Spacing=2mm, Supplier=LCSC, Supplier Footprint=插件,P=2mm, Supplier Part=C19077315, Symbol=PHB2.0-02-28PZZ
U2: JLCPCB Part Class="Extended Part", LCSC Part Name="LTE Standard 模块 停产", Manufacturer=Quectel(移远), Add into BOM=yes, Convert to PCB=yes, Datasheet=https://atta.szlcsc.com/upload/public/pdf/source/20221128/3247853C8E24B9EB0EE07D4BC508718A.pdf, Device=EC800MCNGA-I05-SGNSA, Manufacturer Part=EC800MCNGA-I05-SGNSA, Supplier=LCSC, Supplier Footprint=SMD,15.8x17.7mm, Supplier Part=C5200736, Symbol=EC800MCNGA-I05-SGNSA
USB1: Core Colour=黑色, Current Rating - Power (Max)=5A, JLCPCB Part Class="Extended Part", LCSC Part Name="Type-C 母 卧贴", Manufacturer="SHOU HAN(首韩)", Operating Temperature Range=-25℃~+85℃, Rated Voltage (Max)=5V, Add into BOM=yes, Connect-Disconnect Life=5千次, Connector Type=Type-C, Convert to PCB=yes, Datasheet=https://atta.szlcsc.com/upload/public/pdf/source/20211123/39B17C16241EAC15C5E277BDA434118E.pdf, Device="TYPE-C 16PIN 2MD(073)", Gender=母, Manufacturer Part="TYPE-C 16PIN 2MD(073)", Mounting Style=卧贴, Number of Contacts=16P, Number of Ports=1, Standard="USB 3.1", Supplier=LCSC, Supplier Footprint=SMD, Supplier Part=C2765186, Symbol="TYPE-C 16PIN 2MD(073)"
BTB1 BTB2: System=Connector

## Via types
v1: diameter 24, hole 12, Top Layer to Bottom Layer, 532 vias
v2: diameter 48, hole 30, Top Layer to Bottom Layer, 20 vias
v3: diameter 48, hole 24, Top Layer to Bottom Layer, 16 vias
v4: diameter 48, hole 32, Top Layer to Bottom Layer, 10 vias
v5: diameter 60, hole 32, Top Layer to Bottom Layer, 7 vias
v6: diameter 251.97, hole 165.35, Top Layer to Bottom Layer, 4 vias
v7: diameter 31.5, hole 31.5, Top Layer to Bottom Layer, 2 vias
v8: diameter 47.24, hole 47.24, Top Layer to Bottom Layer, 2 vias
v9: diameter 36, hole 24, Top Layer to Bottom Layer, 1 vias

## Nets (pads, with @x,y where several pads share a name; then routed paths per layer and width w, separated by ;. In a path a pad name is that pad's centre, name@x,y a point inside that pad or via, vN(x,y) a via of type N, cw(c..) or ccw(c..) an arc to the next point about the centre after c; other vN are vias at no path point)
3.3V: C68.2 C69.2 C95.1 C100.1 C102.1 C104.1 C106.1 C108.1 C110.1 CN3.1 CN4.1 E2.1 E3.1 E4.1 F1.1 F2.1 IC13.2 IC13.4 IC22.24 IC23.1 IC23.24 IC24.5 IC25.5 IC26.7 IC27.7 IC27.8 IC28.7 IC28.8 IC29.3 IC30.3 IC33.7 IC33.8 IC34.7 IC34.8 IC35.3 IC36.3 IC39.7 IC39.8 IC40.7 IC40.8 IC41.3 IC42.3 J34.2 R9.1 R10.1 R31.1 R43.1 R57.1 R69.1 R83.1 R95.1 R106.1 R118.2 R119.2 R128.1 R129.1 R161.1 R162.1 R163.2 R166.2 R169.1 R179.1 R180.1 R185.1 R186.1 R200.1 R201.1 | length 29858.7
  Top Layer w8: R10.1@961.26,1741.5 962.47,1742.71 v1(962.47,1840) ; v1(1065,3925) 1065,3850.28 R9.1@1065.28,3850 ; R31.1@1551.26,1741.5 1552.47,1742.71 v1(1552.47,1840) ; v1(1690,3925) 1690,3850.28 R43.1@1690.28,3850 ; R57.1@2131.26,1741.5 2132.47,1742.71 v1(2132.47,1840) ; v1(2315,3925) 2315,3855.28 R69.1@2320.28,3850 ; R83.1@2711.26,1741.5 2712.47,1742.71 v1(2712.47,1840) ; v1(2960,3925) 2960,3850.28 R95.1@2960.28,3850 ; R106.1@3311.26,1741.5 3315,1745.24 v1(3315,1840) ; v1(3590,3890) 3590,3850.28 R128.1@3590.28,3850 ; R129.1@3901.26,1741.5 3905,1745.24 v1(3905,1840) ; IC22.24@5210.75,2649.33 5210.75,2669.51 5215.61,2674.37 5235.58,2674.37 5265,2703.79 R162.1@5265,2733.5 ; IC23.24@5640.75,2649.33 5640.75,2669.51 5645.61,2674.37 5665.58,2674.37 5695,2703.79 R161.1@5695,2733.5 5694.02,2733.5 5640.75,2786.77 IC23.1@5640.75,2880.67
  Top Layer w10: IC41.3@4409.84,1227.99 4410.75,1227.09 4410.75,1196.26 4414.65,1192.36 4414.65,1181.34 C108.1@4425.98,1170 ; IC29.3@4684.69,1225.98 4685.59,1225.08 4685.59,1194.25 4689.65,1190.2 4689.65,1181.34 C100.1@4700.98,1170 ; IC36.3@4959.84,1227.99 4959.84,1196.26 4964.65,1191.46 4964.65,1181.34 C106.1@4975.98,1170 ; IC42.3@5234.84,1227.99 5234.84,1196.26 5239.65,1191.46 5239.65,1181.34 C110.1@5250.98,1170 ; IC35.3@5509.84,1227.99 5510.75,1227.09 5510.75,1196.26 5514.65,1192.36 5514.65,1181.34 C104.1@5525.98,1170 ; IC30.3@5784.84,1227.99 5785.75,1227.09 5785.75,1196.26 5789.65,1192.36 5789.65,1181.34 C102.1@5800.98,1170
  Top Layer w12: CN3.1@790,4629.99 791.5,4628.5 R118.2@791.5,4455 v1(840,4455) ; CN4.1@1215,4629.99 1216.5,4628.49 R119.2@1216.5,4455 v1(1265,4455) ; IC39.7@4425,1418.23 4431.8,1425.02 4431.8,1446.8 4440,1455 4460,1455 4468.2,1446.8 4468.2,1442.25 4470.45,1440 IC39.8@4475,1440 ; C108.1@4425.98,1170 4461.75,1170 4477.64,1185.88 v1(4480.88,1185.88) ; IC39.8@4475.45,1435.91 4497.7,1458.16 4497.7,1462.7 v1(4500,1465) R200.1@4500,1698.5 ; IC27.7@4700,1418.23 4700,1435.45 4706.8,1442.25 4707.25,1442.25 4720.03,1455.03 4729.97,1455.03 4742.75,1442.25 4743.2,1442.25 IC27.8@4750,1435.45 ; C100.1@4700.98,1170 4736.75,1170 4751.75,1185 v1(4755,1185) ; IC27.8@4750,1418.23 IC27.8@4750,1435.45 ; R179.1@4775,1698.5 v1(4775,1465) 4772.7,1462.7 4772.7,1458.16 IC27.8@4750,1435.45 ; R163.2@4871.5,210 4865.33,216.17 4865.33,239.67 v1(4840,265) 4977.48,265 5031.5,210.98 R166.2@5031.5,210 ; IC33.7@4975,1418.23 4975,1435.45 4981.8,1442.25 4982.25,1442.25 4995.03,1455.03 5004.97,1455.03 5017.75,1442.25 5018.2,1442.25 IC33.8@5025,1435.45 ; C106.1@4975.98,1170 5011.75,1170 5026.75,1185 v1(5030,1185) ; IC33.8@5025,1418.23 IC33.8@5025,1435.45 ; R185.1@5050,1698.5 v1(5050,1465) 5047.7,1462.7 5047.7,1458.16 IC33.8@5025,1435.45 ; IC40.7@5250,1418.23 5250,1435.45 5256.8,1442.25 5257.25,1442.25 5270.03,1455.03 5279.97,1455.03 5292.75,1442.25 5293.2,1442.25 IC40.8@5300,1435.45 ; C110.1@5250.98,1170 5286.75,1170 5301.75,1185 v1(5305,1185) ; R162.1@5265,2733.5 5265.75,2734.25 5304.25,2734.25 v1(5305,2735) ; IC40.8@5300,1418.23 IC40.8@5300,1435.45 ; R201.1@5325,1698.5 v1(5325,1465) 5322.7,1462.7 5322.7,1458.16 IC40.8@5300,1435.45 ; IC34.7@5525,1418.23 5525,1435.45 5531.8,1442.25 5532.25,1442.25 5545.03,1455.03 5554.97,1455.03 5567.75,1442.25 5568.2,1442.25 IC34.8@5575,1435.45 ; C104.1@5525.98,1170 5566.75,1170 5581.75,1185 v1(5585,1185) ; IC34.8@5575,1418.23 IC34.8@5575,1435.45 ; R186.1@5600,1698.5 v1(5600,1465) 5597.7,1462.7 5597.7,1458.16 IC34.8@5575,1435.45 ; R161.1@5695,2733.5 5695.75,2734.25 5734.25,2734.25 v1(5735,2735) ; IC28.7@5800,1418.23 5800,1435.45 5806.8,1442.25 5807.25,1442.25 5820.03,1455.03 5829.97,1455.03 5842.75,1442.25 5843.2,1442.25 IC28.8@5850,1435.45 ; C102.1@5800.98,1170 5846.75,1170 5861.75,1185 v1(5865,1185) ; IC28.8@5850,1418.23 IC28.8@5850,1435.45 ; R180.1@5875,1698.5 v1(5875,1465) 5872.7,1462.7 5872.7,1458.16 IC28.8@5850,1435.45 ; v1(6120,2550) IC25.5@6170,2550 ; v1(6120,2815) IC24.5@6170,2815 ; IC26.7@6212.01,1989.84 6251.69,1989.84 6267.83,2005.98 C95.1@6270,2005.98 ; v1(6270,2050) C95.1@6270,2005.98 ; R169.1@6330,2011.5 6327.24,2008.74 6272.76,2008.74 C95.1@6270,2005.98 ; 6461.09,4440 6881.09,4440
  Top Layer w20: v3(5925,4135) 5930.36,4140.36 5950.36,4140.36 6100.18,4290.18 6311.26,4290.18 6453.04,4431.96 6873.04,4431.96 6881.09,4440 6960,4518.91 E3.1@6960,4523.84 ; 6461.09,4440 6540,4518.91 E4.1@6540,4523.84
  Top Layer w30: v1(5865,1185) 5865,1128.31 5961.22,1032.09 F2.1@5975,1032.09 F1.1@6075,1032.09
  Top Layer w40: E2.1@5641.17,3745 5641.17,3739.98 5645,3736.14 5645,3675 5690,3630 v4(5690,3625) ; v4@5688.47,3626.53 v4(5690,3625) ; IC13.2@5810,3870.08 5810,3825 5783.74,3798.74 C68.2@5765.98,3798.74 C69.2@5765.98,3738.74 5765.98,3719.1 5765.98,3700.98 v4(5690,3625)
  Top Layer w60: IC13.4@5810,4134.92 5810.08,4135 v3(5925,4135)
  GND w20: v1(840,4455) 1030,4265 ; v1(1065,3925) 1030,3960 1030,4265 ; v1(1265,4455) 1075,4265 1030,4265
  POWER w12: 4542,1247 4717.35,1071.65 4717.35,387.65 v1(4840,265)
  POWER w20: v1(962.47,1840) v1(1552.47,1840) v1(2132.47,1840) v1(2712.47,1840) v1(3315,1840) v1(3905,1840) ; v1(1065,3925) v1(1690,3925) 3555,3925 v1(3590,3890) ; v1(4480.88,1185.88) 4542,1247 4542,1433.25 v1@4510.25,1465 ; v1(4755,1185) 4817,1247 4817,1423.25 v1@4775.25,1465 ; v1(5030,1185) 5096,1251 5096,1433.25 5064.25,1465 ; v1(5305,1185) 5366.8,1246.8 5366.8,1423.2 v1(5325,1465) ; v1(5585,1185) 5642,1242 5642,1433.25 5615.25,1460
  POWER w30: v1(6120,2550) v1(6120,2815)
  POWER w40: v1(3590,3890) 3795,3685 4275,3685 ; v1(5305,2735) 5305,2810 5520,3025 5735,2810 v1(5735,2735) ; v1(6270,2050) 6405,2185 6405,2395 6505,2495 6505,3260
  POWER w50: v1(5865,1185) 5932,1252 5932,1428.44 ; 6505,3260 6905,3260 J34.2@7000,3355
  POWER w60: 5520,3025 5520,3455 v4(5690,3625) ; 5615.25,1460 5620.25,1465 ; 5932,1428.44 5895.44,1465 v1(5875,1465) 5620.25,1465 ; v1(6120,2815) 6120,3400 5895,3625 ; 6505,3260 6140,3625 5895,3625 ; 5620.25,1465 v1(5600,1465) v1(5325,1465) 4775.25,1465 v1(4775,1465) 4510.25,1465 v1(4500,1465) 4280,1465 v1(3905,1840) 3905,3315 4275,3685 5630,3685 v4(5690,3625) ; v4(5690,3625) 5895,3625
  Bottom Layer w60: v4(5690,3625) 5690,3930 5895,4135 v3(5925,4135)
3.3V_MCU: BTB1.30 J34.1 | length 3426.8
  Top Layer w30: v4(4305,3275) 4308.44,3271.56 4327.74,3271.56 4367.01,3232.28 BTB1.30@4376.38,3232.28
  Bottom Layer w40: v4(4305,3275) 4305,3055.82 4424.93,2935.89 5880.89,2935.89 6421,3476 6979,3476 J34.1@7100,3355
3.3Vout1: F1.2 J19.16 | length 528.8
  Top Layer w30: J19.16@5940,445.04 6075,580.04 F1.2@6075,917.91
3.3Vout2: F2.2 J19.17 | length 626.1
  Top Layer w30: J19.17@5782.52,445.04 5796.55,459.07 5839.07,459.07 6025,645 6025,845 5992.92,877.08 5992.92,912.24 5987.25,917.91 F2.2@5975,917.91
3.8V_EC800M: C67.2 C92.2 C93.2 D37.2 IC15.4 R108.1 U2.42 U2.43 | length 3818.6
  Top Layer w30: U2.42@6706.65,1582.04 6779.02,1582.04 ; U2.43@6706.65,1625.35 6739.65,1625.35 6779.02,1585.98
  Top Layer w40: IC15.4@6582.76,4011.2 6583.25,4010.7 6662.6,4010.7 6744.81,3928.5 6804.49,3928.5 C67.2@6810,3934.02 6934.02,3934.02 v4(6935,3935)
  Top Layer w50: 6779.02,1582.04 6794.5,1582.04 D37.2@6796.54,1580 6804.02,1572.52 C93.2@6804.02,1520 C92.2@6804.02,1465 6804.02,1395.98 v4(6860,1340)
  POWER w80: v4(6860,1340) 7110,1340 7190,1420 7190,3680 v4(6935,3935)
4G_RESET_PTD12: BTB2.58 | length 1.3
  Top Layer w8: BTB2.58@6568.5,2381.89 BTB2.58@6569.45,2380.94
5V: C59.1 C77.2 C88.1 C89.1 E1.1 F3.2 F4.2 IC18.3 IC24.3 IC25.3 IC27.3 IC28.3 IC33.3 IC34.3 IC39.3 IC40.3 J33.1 L7.2 R94.1 | length 16339.3
  Top Layer w12: C77.2@834.02,910 834.02,907.83 C77.2@834.21,907.64 ; IC18.3@834.41,835.4 834.21,835.6 C77.2@834.21,907.64 ; v1(4249,1700) 4249,519 3870,140 1105,140 940,305 940,829.46 889.96,879.5 862.35,879.5 C77.2@834.21,907.64 ; v1(4375,1580) IC39.3@4375,1631.77 ; v1(4650,1580) IC27.3@4650,1631.77 ; v1(4925,1580) IC33.3@4925,1631.77 ; v1(5200,1580) IC40.3@5200,1631.77 ; v1(5475,1580) IC34.3@5475,1631.77 ; v1(5750,1580) IC28.3@5750,1631.77 ; v1(6325,2500) IC25.3@6382.6,2500 6383.09,2500.49 6449.51,2500.49 C88.1@6450,2500.98 ; v1(6325,2765) IC24.3@6382.6,2765 6383.09,2765.49 6449.51,2765.49 C89.1@6450,2765.98
  Top Layer w20: R94.1@4506.5,4060 4566.5,4000 4941.06,4000 L7.2@5053.13,4112.07
  Top Layer w45: v4(5450,3615) 5450,3715.81 5451.17,3716.98 E1.1@5451.17,3745 5465,3745 5516.9,3796.9 5519.35,3796.9 ; F4.2@5583.05,3834 5545.96,3796.9 5519.35,3796.9 ; F3.2@5583.05,4034 5519.35,3970.29 5519.35,3796.9
  Top Layer w50: L7.2@5070,4095.2 5076.5,4088.7 5134.25,4088.7 5370.79,3852.17 5372.91,3852.17 5393.03,3832.05 5393.03,3829.92 5414.84,3829.92 5437.09,3807.68 5437.09,3759.08 E1.1@5451.17,3745
  POWER w30: v1(4375,1580) v1(4650,1580) v1(4925,1580) v1(5200,1580) v1(5475,1580) v1(5750,1580) ; v1(6325,2500) v1(6325,2765)
  POWER w50: v1(4249,1700) 4249,2004 4585,2340 ; 4260,1695 v1(4375,1580)
  POWER w60: 4585,2340 4585,2350 ; v4(5450,3615) 5420,3585 4785,3585 4585,3385 4585,2350 ; 6002.5,2157.5 6325,2480 v1(6325,2500) ; J33.1@7000,3195 6727,2922 6727,2567 6575,2415 6575,2090 6398,1913 6247,1913 5992.5,2167.5 5985,2175 4760,2175 4585,2350
5V_COM: BTB1.31 J33.2 | length 3609.6
  Top Layer w30: v4(4135,3275) 4138.44,3271.56 4157.66,3271.56 4196.93,3232.28 BTB1.31@4206.3,3232.28
  Bottom Layer w40: v4(4135,3275) 4250,3160 4250,3035 4400,2885 5915,2885 6450,3420 6825,3420 6975,3270 7035.34,3270 7066.37,3238.97 7066.37,3236.18 7100,3202.55 J33.2@7100,3195
active_switch_IL+: CN2.+ K2.4 Q2.1 Q2.2 Q2.3 | length 2137.3
  Top Layer w40: K2.4@3994.41,4500 4115.41,4379 5389.05,4379 5391.05,4381 5482.54,4381 CN2.+@5671.54,4570
  Top Layer w60: CN2.+@5671.54,4570 5709.92,4531.62 Q2.1@5709.92,4355 Q2.2@5709.92,4305 Q2.3@5709.92,4255
active_switch_IL-: CN2.- K2.3 Q2.5 Q2.6 Q2.7 Q2.8 | length 2323.6
  Top Layer w40: K2.3@4270,4500 4345,4425 5370,4425 5470.77,4525.77 5470.77,4615.77 5569.17,4714.17 5810.83,4714.17 CN2.-@5955,4570
  Top Layer w60: Q2.5@5930.08,4205 Q2.6@5930.08,4255 Q2.7@5930.08,4305 Q2.8@5930.08,4355 5930.08,4545.08 CN2.-@5955,4570
ADC1_P1_PTA13: BTB1.9 IC41.5 R192.2 R193.1 | length 1559.8
  Top Layer w6: IC41.5@4429.53,1352.01 4429.53,1362.83 4432.43,1365.74 4446.59,1365.74 4457.57,1376.72 4489.03,1376.72 4510,1397.69 v1(4510,1408)
  Top Layer w8: BTB1.9@4376.38,2570.87 4396.06,2570.87 4401.91,2565.02 4411.54,2565.02 4538,2438.57 4538,2261.69 4563,2236.69 4563,2207 4665,2105 4665,2036.5 R192.2@4640,2011.5 4640.98,2011.5 4670,1982.48 v1(4670,1911.91) ; 4663.5,2035 4676.5,2035 4685.3,2026.2 4685.3,2025.21 4699.02,2011.5 R193.1@4700,2011.5
  Bottom Layer w8: v1(4510,1408) 4527.41,1425.41 4532.18,1425.41 4676,1569.23 4676,1901.58 4670,1907.58 v1(4670,1911.91)
ADC1_P1_PTA13_H: IC41.8 J19.23 R191.1 | length 1245.7
  Top Layer w8: IC41.8@4370.47,1352.01 4370.47,1295.5 4325,1250.03 4325,802.52 4364.02,763.5 R191.1@4365,763.5 4365,735 4605,495 4787.68,495 J19.23@4837.64,445.04
ADC1_P4_PTA14: BTB1.12 IC41.4 R195.2 R196.1 | length 2156.2
  Top Layer w8: BTB1.12@4376.38,2665.35 4396.06,2665.35 4407.72,2653.7 4410.05,2653.7 4580,2483.75 4580,2350 4840,2090 4973.75,2090 5025,2038.75 5025,2036.5 5014.7,2026.2 5014.7,2025.21 5000.98,2011.5 5028.7,1983.78 5028.7,1924.39 5039.93,1913.16 v1(5039.93,1908.83) ; IC41.4@4429.53,1227.99 4429.53,1238.82 4431.43,1240.72 4475.39,1240.72 4480.17,1245.5 v1(4484.5,1245.5) ; 5025,2035 5036.5,2035 5045.3,2026.2 5045.3,2025.21 5059.02,2011.5 R196.1@5060,2011.5
  Bottom Layer w8: v1(4484.5,1245.5) 4753.38,1514.38 4764.38,1514.38 5039.93,1789.93 v1(5039.93,1908.83)
ADC1_P4_PTA14_H: IC41.1 J19.22 R194.1 | length 1261.7
  Top Layer w8: IC41.1@4370.47,1227.99 4370.47,1218.09 4368.57,1216.19 4358.67,1216.19 4339,1196.52 4339,941 4393.7,886.3 4393.7,793.82 4424.02,763.5 R194.1@4425,763.5 4425,695 4605,515 4870,515 4936.13,448.87 4991.29,448.87 J19.22@4995.12,445.04
ADC2_P3_PTE21: BTB1.11 R136.2 R137.1 | length 951.3
  Top Layer w8: BTB1.11@4376.38,2633.86 4396.06,2633.86 4407.72,2622.2 4410.05,2622.2 4566,2466.25 4566,2309 4803.88,2071.12 4870.37,2071.12 4905,2036.5 4903.5,2035 ; R136.2@4880.98,2011.5 R136.2@4880,2011.5 4903.5,2035 ; R137.1@4940,2011.5 4939.02,2011.5 4925.3,2025.21 4925.3,2026.2 4916.5,2035 4903.5,2035
ADC2_P4_PTE22: BTB1.10 R147.2 R148.1 | length 829.4
  Top Layer w8: BTB1.10@4376.38,2602.36 4396.06,2602.36 4407.72,2590.71 4410.05,2590.71 4552,2448.76 4552,2267.49 4784.49,2035 ; R147.2@4760,2011.5 4760.98,2011.5 4784.49,2035 ; R148.1@4820,2011.5 4819.02,2011.5 4805.3,2025.21 4805.3,2026.2 4796.5,2035 4784.49,2035
ADC2_P5_PTE23: BTB1.8 R154.2 R155.1 | length 699.3
  Top Layer w8: BTB1.8@4376.38,2539.37 4376.88,2538.86 4417.91,2538.86 4524,2432.77 4524,2235.63 4545,2214.63 4545,2036.5 R154.2@4520,2011.5 4520.98,2011.5 R154.2@4534.7,1997.78 ; 4543.5,2035 4556.5,2035 4565.3,2026.2 4565.3,2025.21 4579.02,2011.5 R155.1@4580,2011.5
ADC2_P7_PTE25: BTB1.6 R159.2 R160.1 | length 620.7
  Top Layer w8: BTB1.6@4376.38,2476.38 4396.06,2476.38 4407.72,2464.72 4410.05,2464.72 4510,2364.77 4510,2140 4436.5,2066.5 4436.5,2035 ; R159.2@4400,2011.5 4400.98,2011.5 4414.7,2025.21 4414.7,2026.2 4423.5,2035 4436.5,2035 ; R160.1@4460,2011.5 4459.02,2011.5 4445.3,2025.21 4445.3,2026.2 4436.5,2035
ADC_IN1: J19.1 R136.1 | length 2862.2
  Top Layer w8: v1(4880,1910) R136.1@4880,1948.5
  Bottom Layer w8: v1(4880,1910) 4854,1884 4743.91,1884 4690,1937.91 4617.91,1937.91 4596,1916 4596,1676.6 4430,1510.6 4430,1200 4695,935 5800,935 5916.01,818.99 5916.01,783.99 J19.1@5940,760
ADC_IN2: J19.9 R147.1 | length 2833.7
  Top Layer w8: v1(4760,1910) R147.1@4760,1948.5
  Bottom Layer w8: v1(4760,1910) 4759.56,1910.44 4742.5,1910.44 4701.02,1951.91 4611.91,1951.91 4535,1875 4535,1635.4 4416,1516.4 4416,1229.2 4416,1194.2 4689.2,921 4724.2,921 5714.4,921 5861.26,774.14 J19.9@5861.26,602.52
ADC_IN3: J19.2 R154.1 | length 2366.9
  Top Layer w8: v1(4520,1910) R154.1@4520,1948.5
  Bottom Layer w8: v1(4520,1910) 4520,1640.2 4402,1522.2 4402,1223.4 4402,1188.4 4683.4,907 4718.4,907 5635.52,907 J19.2@5782.52,760
ADC_IN4: J19.10 R159.1 | length 2431.6
  Top Layer w8: v1(4400,1910) R159.1@4400,1948.5
  Bottom Layer w8: v1(4400,1910) 4400,1727.84 4405,1722.84 4405,1545 4388,1528 4388,1182.6 4677.6,893 5584.92,893 5703.78,774.14 J19.10@5703.78,602.52
AIR+: J7.30 K2.2 | length 9299.1
  POWER w120: J7.30@2315.12,445.04 2315.12,390.71 2214.41,290 1440,290 650,1080 650,2040 885,2275 885,2835 645,3075 645,3805 1050,4210 4050,4210 4154.96,4314.96 K2.2@4722.76,4314.96
ANT_MAIN: C90.2 R167.1 U2.35 | length 311.3
  Top Layer w30: U2.35@6623.97,1190.31 6623.97,1140.98 ccw(c6723.97,1140.98) 6723.97,1040.98 C90.2@6770,1040.98 6770.49,1040.49 6828.01,1040.49 R167.1@6828.5,1040
AutoActiveSig_PTC14: BTB2.45 IC21.1 R158.1 | length 4228.9
  Top Layer w8: R158.1@5455,4266.5 5490.81,4266.5 5499.02,4274.7 5529,4274.7 IC21.1@5531.69,4277.4 5532.89,4276.2 5573.8,4276.2 v1(5575,4275) ; v1(6460,2865) 6531.66,2793.34 6566.51,2793.34 BTB2.45@6568.5,2791.34
  Bottom Layer w8: v1(5575,4275) 6735,4275 7275,3735 7275,3200 7154,3079 6992.5,3079 6791.5,3280 6415,3280 6320,3185 6320,3005 v1(6460,2865)
BatCurrentSensor_PTE24: BTB1.7 IC18.6 | length 6154.7
  Top Layer w6: BTB1.7@4376.38,2507.87 4412.13,2507.87 v1(4435,2485)
  Top Layer w8: v1(885,700) 885.3,700.3 885.3,760.3 IC18.6@885.59,760.6
  Bottom Layer w8: v1(885,700) 885,380 1185,80 3755,80 4205,530 4205,1985 4465,2245 4465,2455 v1(4435,2485)
BCAN_H: IC25.7 J19.4 R164.2 | length 2764.3
  Top Layer w8: v1(5390,2080) 5491,2181 5871,2181 6060,2370 6060,2409.49 6094.02,2443.5 R164.2@6095,2443.5 6101.5,2450 IC25.7@6170,2450
  POWER w8: v1(5220,1071) 5220,1067.23 5272.9,1014.33 5272.9,977.9 5467.56,783.24 J19.4@5467.56,760
  Bottom Layer w8: v1(5220,1071) 5215.67,1071 5208.67,1064 5081,1064 4950,1195 4950,1416.21 5355,1821.21 5355,2045 v1(5390,2080)
BCAN_L: IC25.6 J19.3 R164.1 | length 3032.5
  Top Layer w8: v1(5355,2085) 5465,2195 5865.2,2195 6040.65,2370.45 6040.65,2439.71 6073.62,2472.68 6087.68,2472.68 6095,2480 R164.1@6095,2506.5 6101.5,2500 IC25.6@6170,2500
  POWER w8: v1(5259,1065) 5260,1065 5286.9,1038.1 5286.9,985 5416.9,855 5530.04,855 J19.3@5625.04,760
  Bottom Layer w8: v1(5259,1065) 5259,1064.6 5239.4,1045 5080.2,1045 4936,1189.2 4936,1422.01 5340,1826.01 5340,2070 v1(5355,2085)
CAN1_RX_PTB23: BTB2.47 IC24.4 | length 221.8
  Top Layer w8: IC24.4@6382.6,2815 6450,2815 6530.81,2734.19 6562.66,2734.19 BTB2.47@6568.5,2728.35